# Altium PCB Driver Morpheus PONTE H.PcbDoc
Units mm, origin at the board's own origin, x right, y up, seen from the top; angles counter-clockwise.
Board outline 45.95 x 30.93 mm, 2 copper layers (Top Layer, Bottom Layer); 49 components, 26 nets, 137 pads, 17 vias.
Unrouted connection lines stored in the file: 31.
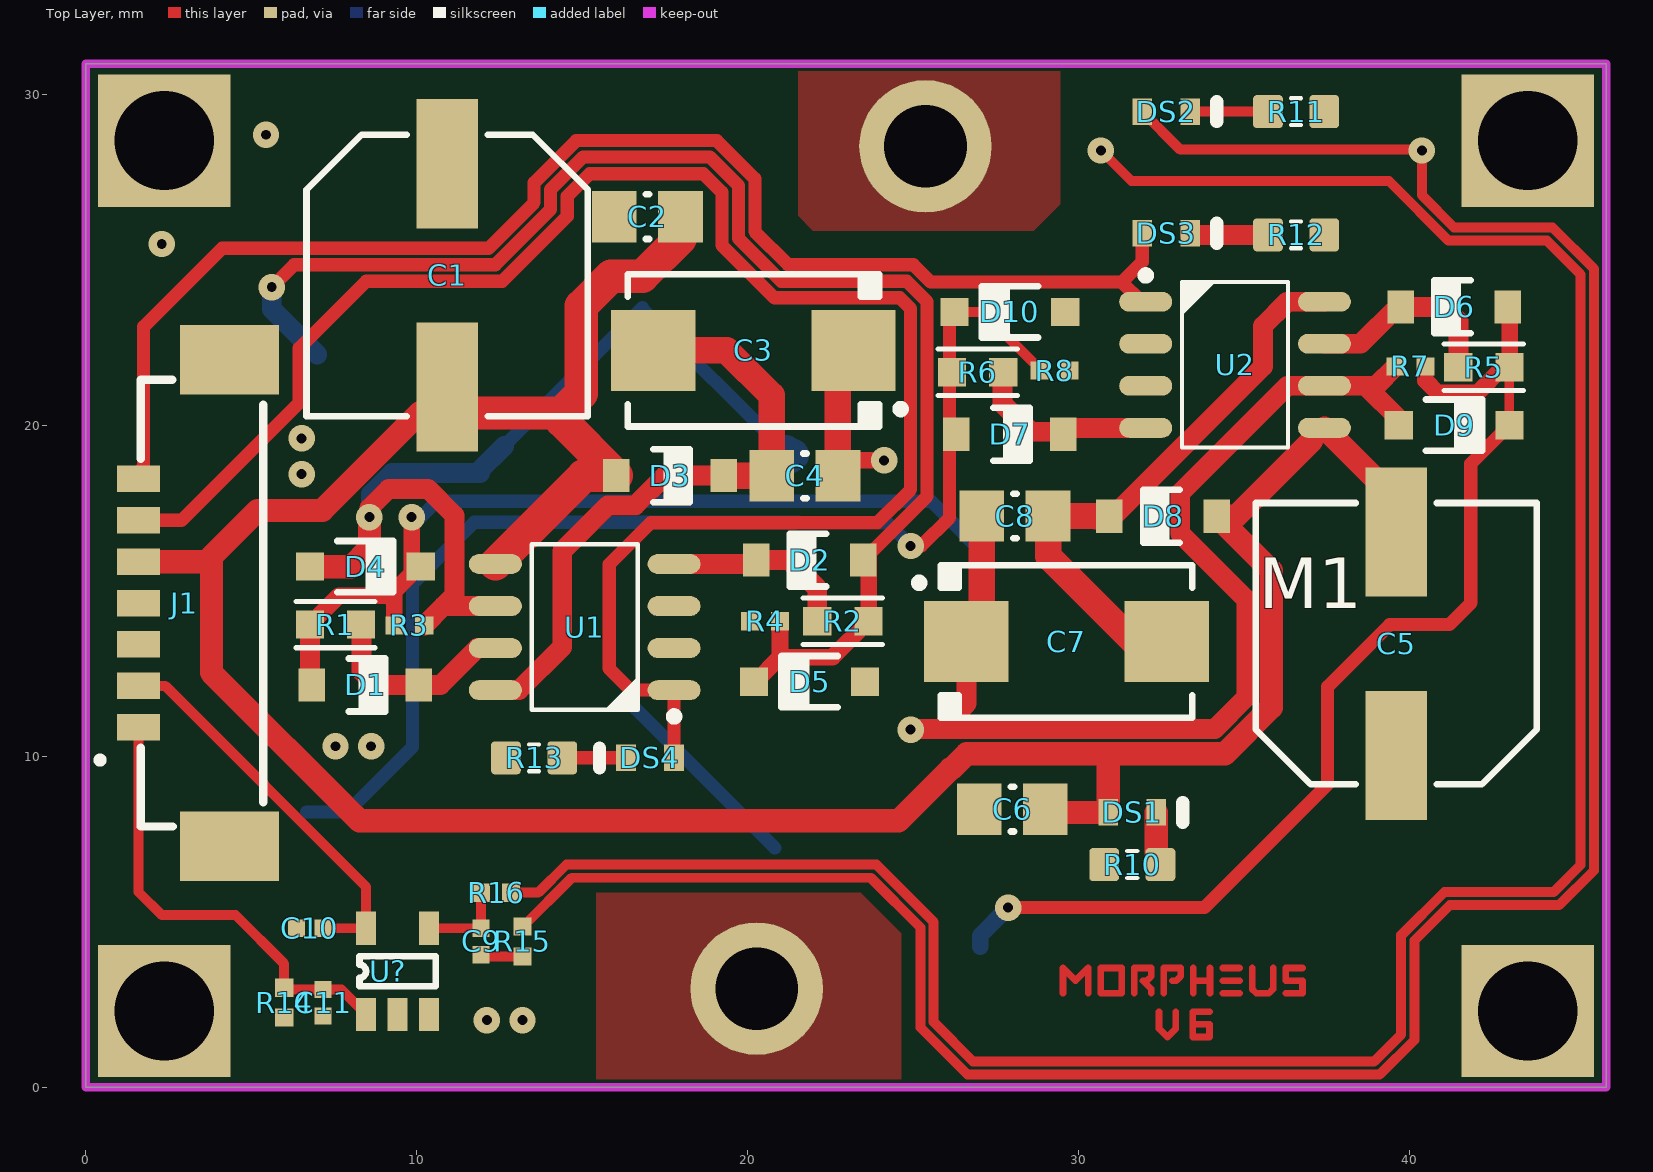
[diagram p0: Top Layer view]
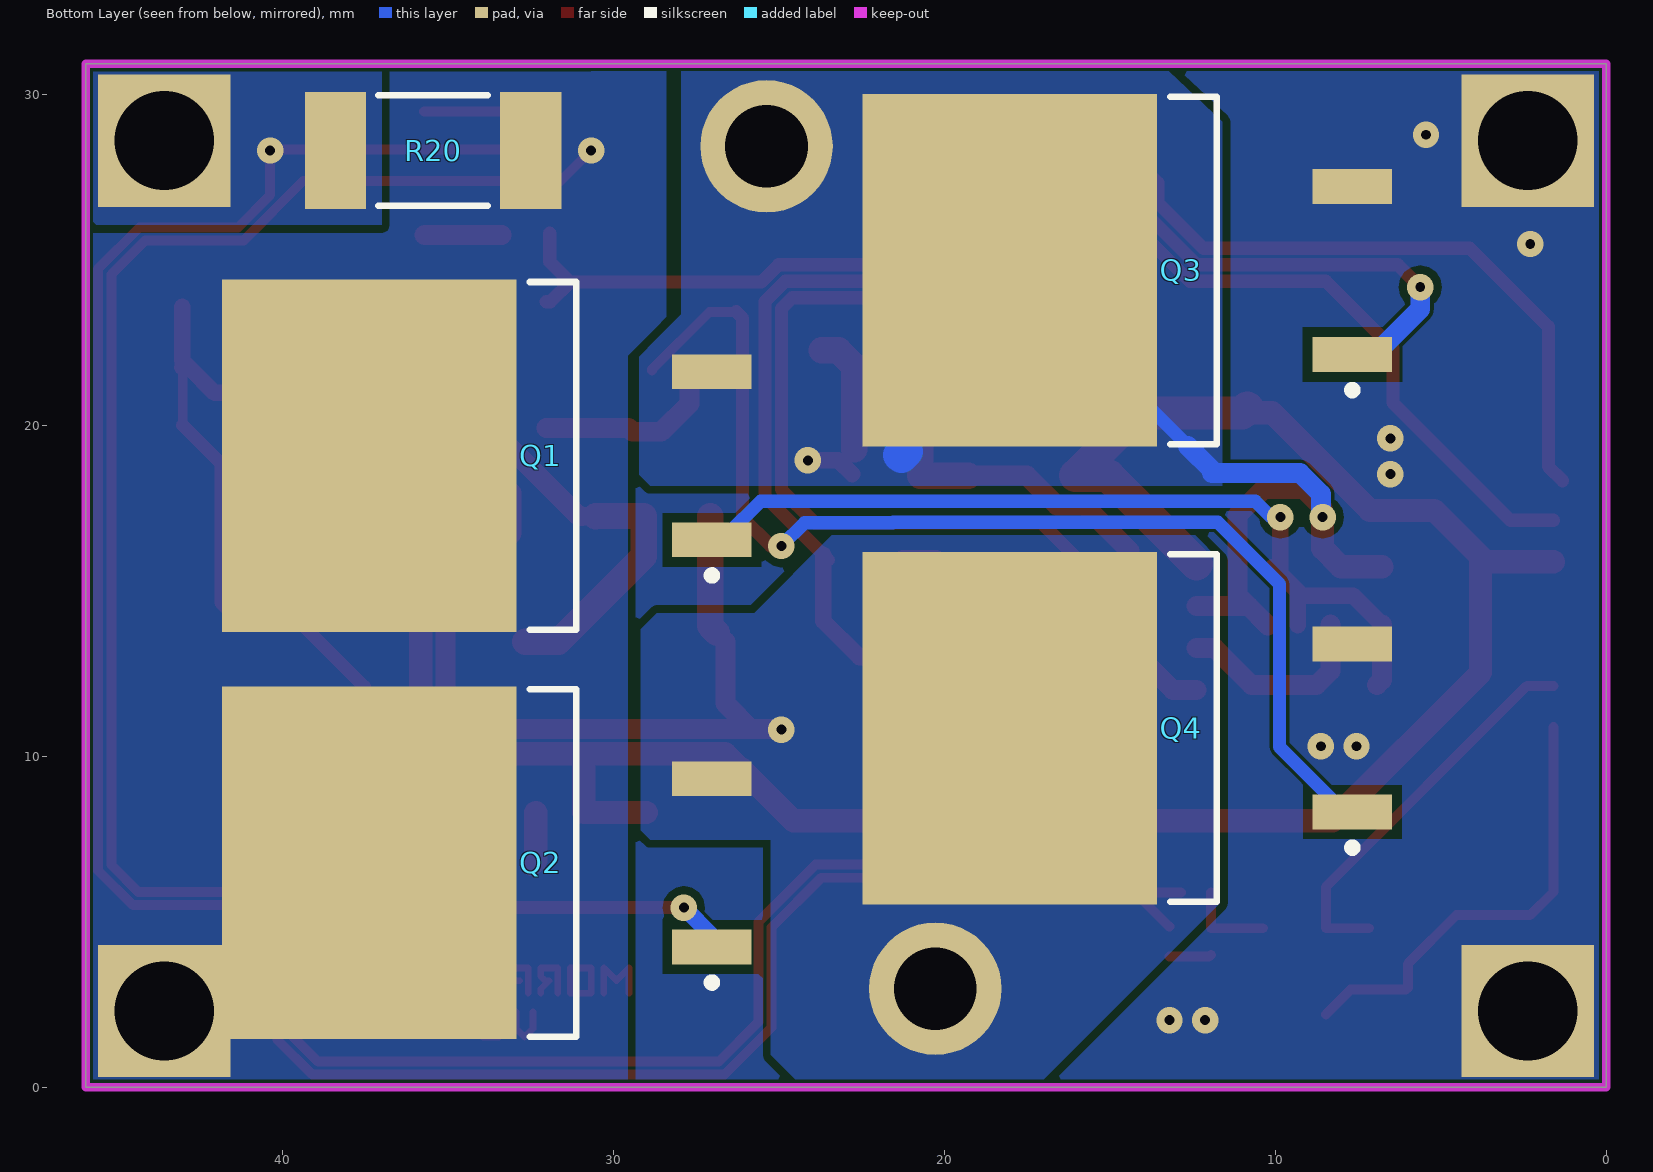
[diagram p1: Bottom Layer view, seen from below]

## Layer stack, top to bottom
Top Solder: solder mask 0.0102, Solder Resist, Dk 3.5
Top Layer: signal copper 0.0356
Dielectric 1: dielectric 0.32, FR-4, Dk 4.8
Bottom Layer: signal copper 0.0356
Bottom Solder: solder mask 0.0102, Solder Resist, Dk 3.5

## Board outline
0,0 45.95,0 45.95,30.925 0,30.925

## Design rules (kind name [scope] priority, off if disabled: settings)
BoardOutlineClearance [All] p1: gap=0 ignorepadtopadclearanceinfootprint=FALSE
Clearance Clearance_1 [IsPad vs InPolygon] p1: gap=0.3 ignorepadtopadclearanceinfootprint=TRUE
Clearance [All] p2: gap=0.24 ignorepadtopadclearanceinfootprint=TRUE except(0: SMDPad-Hole THPad-Hole Via-Hole Fill-Hole Poly-Hole Region-Hole Text-Hole; 0.1: Arc-Arc Arc-Track Arc-SMDPad Arc-THPad Arc-Via Arc-Fill Arc-Poly Arc-Region Arc-Text Arc-Hole Track-Track Track-SMDPad Track-THPad Track-Via Track-Fill Track-Poly Track-Region Track-Text Track-Hole)
ComponentClearance [All vs InComponentClass('IGNORA')] p1: gap=-1 collisioncheckmode=3 verticalgap=-1 showdistances=FALSE
ComponentClearance ComponentClearance_1 [All] p2: gap=0.254 collisioncheckmode=3 verticalgap=0.254 showdistances=FALSE
HoleSize [All] p1: absolutevalues=TRUE maxlimit=3.54 minlimit=0.025 maxpercent=80.000 minpercent=20.000
MinimumSolderMaskSliver [All] p1 off: minsoldermaskwidth=0.254
PlaneConnect [All] p1: planeconnectstyle=Direct reliefexpansion=0.508 reliefentries=4 reliefconductorwidth=0.254 reliefairgap=0.254
PolygonConnect [All] p1: connectstyle=Direct reliefconductorwidth=0.254 reliefentries=4 polygonreliefangle="90 Angle" airgapwidth=0.254
RoutingVias [All] p1: holewidth=0.3 width=0.4 viastyle="Through Hole" minholewidth=0.3 minwidth=0.4 maxholewidth=0.4 maxwidth=0.6
SMDNeckDown [InNet('No Net')] p1: percent=70.000
SilkToSilkClearance [All] p1 off: silktosilkclearance=0.254
SilkToSolderMaskClearance [IsPad] p1 off: minsilkscreentomaskgap=0.254 clearancetoexposedcopper=TRUE
SolderMaskExpansion [All] p1: expansion=0.102
Width [All] p1: maxlimit=15 minlimit=0.01 preferedwidth=0.3
24 further rules are at their usual default settings.

## Classes and differential pairs
component class INA169: C9 C10 C11 R14 R15 R16 U?
component class "Driver Morpheus PONTE H": C1 C2 C3 C4 C5 C6 C7 C8 D1 D2 D3 D4 D5 D6 D7 D8 D9 D10 DS1 DS2 DS3 DS4 J1 Q1 Q2 Q3 Q4 R1 R2 R3 R4 R5 R6 R7 R8 R10 R11 R12 R13 R20 U1 U2

## Components (designator, comment, footprint, x,y, rotation, side; value= is the part's Value field where it differs from the comment)
C1 "100uF 25v" CAPAE9083X70M 10.925,24.525 r270 top
C2 "CAP 100nF 25V 0805(2012)" CAPC0805(2012)145_M#1 16.975,26.3 r0 top value=100nF
C3 "Cap_10u_35v" "CAP POL 2917/7343" 20.176,22.262 r180 top
C4 "CAP 100nF 25V 0805(2012)" CAPC0805(2012)145_M#2 197.372,-55.572 r180 top value=100nF
C5 "100uF 25v" CAPAE9083X70M 39.6,13.4 r90 top
C6 "CAP 100nF 25V 0805(2012)" CAPC0805(2012)145_M#1 28,8.4 r0 top value=100nF
C7 "Cap_10u_35v" "CAP POL 2917/7343" 29.636,13.463 r0 top
C8 "CAP 100nF 25V 0805(2012)" CAPC0805(2012)145_M#2 -147.56,91.297 r0 top value=100nF
C9 "CAP 100nF 25V" CAPC0402(1005)60_L 11.95,4.4 r270 top value=100nF
C10 "CAP 100nF 25V" CAPC0402(1005)60_L 6.775,4.8 r0 top value=100nF
C11 "CAP 100nF 25V" CAPC0402(1005)60_L 7.175,2.55 r90 top value=100nF
D1 "1N4148W" JSCJ-SOD-123-2_V 8.45,12.15 r0 top
D2 "1N4148W" JSCJ-SOD-123-2_V 21.881,15.925 r180 top
D3 "1N4148W" JSCJ-SOD-123-2_V 17.656,18.475 r0 top
D4 "MMSZ5248B-E3-08" VISH-SOD-123-2_V 8.45,15.725 r0 top
D5 "MMSZ5248B-E3-08" VISH-SOD-123-2_V 21.875,12.25 r180 top
D6 "1N4148W" JSCJ-SOD-123-2_V 41.35,23.575 r180 top
D7 "1N4148W" JSCJ-SOD-123-2_V 27.925,19.725 r0 top
D8 "1N4148W" JSCJ-SOD-123-2_V 32.555,17.25 r180 top
D9 "MMSZ5248B-E3-08" VISH-SOD-123-2_V 41.35,20 r0 top
D10 "MMSZ5248B-E3-08" VISH-SOD-123-2_V 27.925,23.425 r180 top
DS1 "TLMB1100-GS08" VISH-TLMX1100-2_V 31.625,8.3 r0 top
DS2 "TLMS1100-GS08" VISH-TLMX1100-2_V 32.65,29.475 r0 top
DS3 "TLMG1100-GS08" VISH-TLMX1100-2_V 32.65,25.8 r0 top
DS4 "TLMG1100-GS08" VISH-TLMX1100-2_V 17.05,9.95 r180 top
J1 "53398-0771" 53398-0771 1.668,7.875 r90 top
Q1 "IRF3205S" D2PAK_N 33.825,19.075 r0 bottom
Q2 "IRF3205S" D2PAK_N 33.825,6.775 r0 bottom
Q3 "IRF3205S" D2PAK_N 14.475,24.675 r0 bottom
Q4 "IRF3205S" D2PAK_N 14.475,10.85 r0 bottom
R1 "22" SMD-0603-RES 7.55,13.975 r270 top
R2 "22" SMD-0603-RES 22.881,14.075 r90 top
R3 "RC0402JR-071KL" RES-0402 9.781,13.95 r180 top value=10K
R4 "RC0402JR-071KL" RES-0402 20.531,14.075 r0 top value=10K
R5 "22" SMD-0603-RES 42.25,21.75 r270 top
R6 "22" SMD-0603-RES 26.95,21.6 r90 top
R7 "RC0402JR-071KL" RES-0402 40.031,21.775 r0 top value=10K
R8 "RC0402JR-071KL" RES-0402 29.281,21.65 r180 top value=10K
R10 "Thick Film" RESC1608X55N 31.625,6.725 r180 top value=750R
R11 "Thick Film" RESC1608X55N 36.575,29.475 r0 top value=2k
R12 "Thick Film" RESC1608X55N 36.575,25.75 r0 top value=200R
R13 "Thick Film" RESC1608X55N 13.55,9.95 r180 top value=200R
R14 "RC0402JR-071KL" RES-0402 6,2.55 r90 top value=10K
R15 "RC0402JR-071KL" RES-0402 13.2,4.4 r90 top value=100R
R16 "RC0402JR-071KL" RES-0402 12.4,5.875 r0 top value=100R
R20 "71-WSLF25121L000FEA" RESC6432X89X76ML25T25 35.45,28.3 r0 bottom
U1 "IR2184" SOIC127P600X175-8AN 15.081,13.9 r180 top
U2 "IR2184" SOIC127P600X175-8AN 34.731,21.825 r0 top
U? "INA169" SOT23-5 9.425,2.2 r0 top

## Footprints (in the part's own frame and the unit in brackets; to place one, negate y for a bottom-side part, rotate by r counter-clockwise, add the part's x,y. Pads: shape width x height; smd on the part's side, far side on the other; paste and mask are expansions set on the pad)
53398-0771 [mm]
  rect 0.8x1.3 smd: 1(3,0.068) 2(4.25,0.068) 3(5.5,0.068) 4(6.75,0.068) 5(8,0.068) 6(9.25,0.068) 7(10.5,0.068)
  rect 2.1x3 smd: 8(-0.6,-2.682) 9(14.1,-2.682)
  silkscreen extent 0,-3.7 13.5,1.3, body extent -0.22,-3.68 13.68,0.52, height 4.46
"CAP POL 2917/7343" [mm] "Molded Capacitor, 2-Leads, Body 7.30x4.30mm, IPC Medium Density"
  rect 2.55x2.45 smd: 1(-3.025,0) 2(3.025,0)
  silkscreen extent -4.58,-2.3 3.8,2.3, body extent -3.65,-2.15 3.65,2.15, height 4.1
CAPAE9083X70M [mm] "Aluminum Electrolytic Capacitor, Body 8,30x8,30x7,00mm, IPC Low Density"
  rect 3.9x1.85 smd: 1(-3.375,0) 2(3.375,0)
  silkscreen extent -4.25,-4.25 4.25,4.25, body extent -4.25,-4.25 4.25,4.25, height 7
CAPC0402(1005)60_L [mm] "Chip Capacitor, Body 1.0x0.5mm, Height 0.6mm, IPC High Density"
  rect 0.52x0.52 smd: 1(-0.4,0) 2(0.4,0)
  body extent -0.55,-0.3 0.55,0.3, height 0.6
CAPC0805(2012)145_M#1 [mm] "Chip Capacitor, Body 2.0x1.2mm, Height 1.45mm, IPC Low Density"
  rect 1.35x1.55 smd: 1(-1,0) 2(1,0)
  silkscreen extent -0.05,-0.67 0.05,0.67, body extent -1.1,-0.72 1.1,0.72, height 1.45
CAPC0805(2012)145_M#2 [mm] "Chip Capacitor, Body 2.0x1.2mm, Height 1.45mm, IPC Low Density"
  rect 1.35x1.55 smd: 1(174.641,-74.041) 2(176.641,-74.041)
  silkscreen extent 175.59,-74.72 175.69,-73.37, body extent 174.54,-74.77 176.74,-73.32, height 1.45
D2PAK_N [mm] "D-PAK/TO-263-3; 3 Leads (1 Cropped); Body 14.7 (inc. leads) x 10.2 mm (LxW max)"
  rect 2.4x1.05 smd: 1(-6.8,2.54) 3(-6.8,-2.54)
  rect 8.9x10.65 smd: 2(3.55,0)
  silkscreen extent -6.92,-5.25 -1.3,5.25, body extent -2.7,-5.28 6.3,5.28, height 4.69
JSCJ-SOD-123-2_V [mm] "SMD, 2-Leads, Body 2.7x1.6mm, Height 1.25mm"
  rect 0.8x1 smd: 1(-1.62,0) 2(1.62,0)
  silkscreen extent -0.5,-0.8 0.6,0.8, body extent -1.35,-0.8 1.35,0.8, height 1.25
RES-0402 [mm]
  rect 0.55x0.55 smd: 1(-0.45,0) 2(0.45,0)
  body extent -0.53,-0.27 0.53,0.28, height 0.4
RESC1608X55N [mm] "Chip Resistor, Body 1.6x0.8mm, EIA 0603, IPC Medium Density"
  round 0.254 on Mech15: 0(0,0)
  rrect25% 0.9x1 smd: 1(-0.85,0) 2(0.85,0)
  Top Layer pour cut-out: -0.6,0.5 -0.4,0.7 0.4,0.7 0.6,0.5 0.6,-0.5 0.4,-0.7 -0.4,-0.7 -0.6,-0.5
  silkscreen extent -0.15,-0.41 0.15,0.41, body extent -0.87,-0.47 0.88,0.48, height 0.54
RESC6432X89X76ML25T25 [mm] "Chip Resistor, 2-Leads, Body 6.6x3.43mm, IPC Low Density"
  rect 1.85x3.55 smd: 1(-2.95,0) 2(2.95,0)
  silkscreen extent -1.65,-1.68 1.65,1.68, body extent -3.3,-1.72 3.3,1.71, height 0.89
SMD-0603-RES [mm]
  rect 0.85x0.85 smd: 1(0,0.775) 2(0,-0.775)
  silkscreen extent -0.7,-1.2 0.7,1.2, body extent -0.4,-0.85 0.4,0.85, height 0.56
SOIC127P600X175-8AN [mm] "SOIC, 8-Leads, Body 4.9x3.9mm, Pitch 1.27mm, IPC Medium Density"
  round 1 on Mech15: 0(0,0)
  oval 1.6x0.6 smd: 1(-2.7,1.905) 2(-2.7,0.635) 3(-2.7,-0.635) 4(-2.7,-1.905) 5(2.7,-1.905) 6(2.7,-0.635) 7(2.7,0.635) 8(2.7,1.905)
  silkscreen extent -2.83,-2.5 1.6,2.82, body extent -3,-2.45 3,2.45, height 1.75
SOT23-5 [mm] "SOT143-4 as used in SP0503BAHTG"
  round 0.2 on Top Overlay: 1(-1.5,0.75)
  rect 0.6x1 smd: 1(-0.95,0) 2(0,0) 3(0.95,0) 4(0.95,2.6) 5(-0.95,2.6)
  silkscreen extent -1.15,0.85 1.15,1.75, body extent -1.46,0.13 1.46,2.47, height 1
VISH-SOD-123-2_V [mm] "SMD, 2-Leads, Body 2.7x1.55mm, Height 1.35mm"
  rect 0.85x0.85 smd: 1(-1.675,0) 2(1.675,0)
  silkscreen extent -0.85,-0.77 0.85,0.78, body extent -1.35,-0.77 1.35,0.77, height 1.35
VISH-TLMX1100-2_V [mm] "SMD, 2-Leads, Body 1.6x0.8mm"
  rect 0.6x0.8 smd: 1(-0.725,0) 2(0.725,0)
  silkscreen extent 1.53,-0.3 1.53,0.3, body extent -0.8,-0.4 0.8,0.4, height 0.65

## Part data
C1: library part Cap_10u_35v
C2 C4 C6 C8: library part CMP-1036-04408-1, "CAP 100nF 25V ±5% 0805 (2012 Metric) Thickness 1.45mm SMD", Case-EIA=0805, Case-Metric=2012, Rated Voltage="25 V", Tolerance=±5%, Max Thickness="1.45 mm", Technology=SMT
C5: library part Cap_100u_25v, "Cap Tântalo"
C9 C10 C11: library part CMP-1034-02073-1, "CAP 100nF 25V ±20% 0402 (1005 Metric) Thickness 0.6mm SMD", Case-EIA=0402, Case-Metric=1005, Rated Voltage="25 V", Tolerance=±20%, Max Thickness="0.6 mm", Technology=SMT
D1 D2 D3 D6 D7 D8: library part CMP-0914-00001-1, "Fast Switching Diode, 75 V, 150 mA, 2-Pin 2.7 x 1.6 x 1.25 mm SMD, Tape and Reel", Manufacturer="Changjiang Electronics", ComponentLink1Description="Manufacturer URL", ComponentLink1URL=http://www.cj-elec.com/, ComponentLink2Description=Datasheet, ComponentLink2URL=http://www.cj-elec.com/txUpfile/20121613352740313.pdf, ComponentLink3Description="Package Specification", ComponentLink3URL=http://www.cj-elec.com/txUpfile/201412112231195145.pdf, DatasheetVersion="Rev. A", IO (mA)=150, IR (uA)=1, Mounting Technology="Surface Mount", PackageDescription="2-Pin SMD, Body 2.7 x 1.6 mm, Height 1.25 mm", PackageReference=SOD-123-2, PackageVersion="Rev. A", Packing="Tape and Reel", PartNumber=1N4148W, PD (mW)=350, Trr (ns)=4, TSTG (degC)="-55 to 150", VF (V)=1.25, VR (V)=75
D4 D5 D9 D10: library part CMP-0931-00036-1, "Small Signal Zener Diode, 18 V +/- 5%, -55 to 155 degC, 2-Pin SOD-123, RoHS, Tape and Reel", Manufacturer="Vishay Semiconductor", Operating Temperature="-55 to 150 degC", Power Dissipation (mW)=500, Test Current (IZT1) (mA)=7, Tolerance="+/- 5%", Zener Voltage (NOM.) (V)=18, ComponentLink1Description="Manufacturer URL", ComponentLink1URL=http://www.vishay.com/, ComponentLink2Description=Datasheet, ComponentLink2URL=http://www.vishay.com/docs/85774/mmsz5225.pdf, ComponentLink3Description="Package Specification", ComponentLink3URL=http://www.vishay.com/docs/85774/mmsz5225.pdf, DatasheetVersion="Rev. 1.9", Int. Construction=Single, Mounting Technology="Surface Mount", PackageDescription="2-Pin SMD, Body 2.7 x 1.55 mm, Height 1.35 mm", PackageReference=SOD-123-2, PackageVersion="Rev. 1.9", Packing="Tape and Reel", PartNumber=MMSZ5248B-E3-08, RoHS=TRUE, Zener Impedance (IZT1) (Max.) (Ohm)=21
DS1: library part CMP-1666-00028-1, "Blue LED, 15 mA, 3.9 V, -40 to 100 degC, 2-Pin SMD (0603), RoHS, Tape and Reel / (https://br.mouser.com/datasheet/2/427/tlmb1100-279843.pdf)", Capacitance="10 nF", Case\Package=Radial, Max Operating Temperature="125 degC", Min Operating Temperature="-55 degC", Package Quantity=500, Tolerance=10%, Type (Capacitors)=X7R, Voltage Rating="100 V", ComponentLink1Description="Manufacturer URL", ComponentLink1URL=http://www.vishay.com/, ComponentLink2Description=Datasheet, ComponentLink2URL=http://download.siliconexpert.com/pdfs/2016/8/7/12/43/26/667/vsh_/manual/379263299541529tlmb1100.pdf, DatasheetVersion="Rev. 2.7, 03/2016", Height="2.54 mm", Lead Pitch="2.54 mm", Length="5.33 mm", Mount="Through Hole", PackageDescription="2-Pin Surface Mount Device, Body 1.6 x 0.8 mm", PackageReference=0603, Packaging=Bulk, Pins=2, Radiation Hardening=No, REACH SVHC="No SVHC", RoHSCompliant=true, Width="3.81 mm"
DS2: library part CMP-1666-00028-1, "Red LED, 10 mA, 2.0 V, -40 to 100 degC, 2-Pin SMD (0603), RoHS, Tape and Reel / (https://br.mouser.com/datasheet/2/427/tlmb1100-279843.pdf)", Capacitance="10 nF", Case\Package=Radial, Max Operating Temperature="125 degC", Min Operating Temperature="-55 degC", Package Quantity=500, Tolerance=10%, Type (Capacitors)=X7R, Voltage Rating="100 V", ComponentLink1Description="Manufacturer URL", ComponentLink1URL=http://www.vishay.com/, ComponentLink2Description=Datasheet, ComponentLink2URL=http://download.siliconexpert.com/pdfs/2016/8/7/12/43/26/667/vsh_/manual/379263299541529tlmb1100.pdf, DatasheetVersion="Rev. 2.7, 03/2016", Height="2.54 mm", Lead Pitch="2.54 mm", Length="5.33 mm", Mount="Through Hole", PackageDescription="2-Pin Surface Mount Device, Body 1.6 x 0.8 mm", PackageReference=0603, Packaging=Bulk, Pins=2, Radiation Hardening=No, REACH SVHC="No SVHC", RoHSCompliant=true, Width="3.81 mm"
DS3 DS4: library part CMP-1666-00028-1, "Green LED, 15 mA, 2.1 V, -40 to 100 degC, 2-Pin SMD (0603), RoHS, Tape and Reel / (https://br.mouser.com/datasheet/2/427/tlmb1100-279843.pdf)", Capacitance="10 nF", Case\Package=Radial, Max Operating Temperature="125 degC", Min Operating Temperature="-55 degC", Package Quantity=500, Tolerance=10%, Type (Capacitors)=X7R, Voltage Rating="100 V", ComponentLink1Description="Manufacturer URL", ComponentLink1URL=http://www.vishay.com/, ComponentLink2Description=Datasheet, ComponentLink2URL=http://download.siliconexpert.com/pdfs/2016/8/7/12/43/26/667/vsh_/manual/379263299541529tlmb1100.pdf, DatasheetVersion="Rev. 2.7, 03/2016", Height="2.54 mm", Lead Pitch="2.54 mm", Length="5.33 mm", Mount="Through Hole", PackageDescription="2-Pin Surface Mount Device, Body 1.6 x 0.8 mm", PackageReference=0603, Packaging=Bulk, Pins=2, Radiation Hardening=No, REACH SVHC="No SVHC", RoHSCompliant=true, Width="3.81 mm"
J1: "7 way SMT straight header Molex PICOBLADE Series, Series Number 53398, 1.25mm Pitch 7 Way 1 Row Straight PCB Header, Solder Termination, 1A", Manufacturer_Name=Molex, RS Part Number=5427220P, Allied_Number=70373150, Allied Price/Stock=http://www.alliedelec.com/molex-incorporated-53398-0771/70373150/, Arrow Part Number=53398-0771, Arrow Price/Stock=http://uk.rs-online.com/web/p/products/5427220P, Datasheet Link=http://www.molex.com/webdocs/datasheets/pdf/en-us/0533980771_PCB_HEADERS.pdf, Manufacturer_Part_Number=53398-0771, RS Price/Stock=http://uk.rs-online.com/web/p/products/5427220P
Q1 Q2 Q3 Q4: "HEXFET Power MOSFET", ComponentLink1Description="Manufacturer Link", ComponentLink1URL=http://www.irf.com/, ComponentLink2Description=Datasheet, ComponentLink2URL=http://www.irf.com/product-info/datasheets/data/irf3205s.pdf, DatasheetVersion=Aug-1997, LatestRevisionDate=20-Nov-2009, LatestRevisionNote="IPC-7351 Footprint Added.", PackageDescription="3-Pin Transistor Outline Package 2.54 mm Pitch, 15.1 mm Lead Span", PackageReference=D2PAK, Published=8-Jun-2000, Publisher="Altium Limited"
R1 R2 R5 R6: library part ERJ-3EKF22R0V, "RES SMD 22 OHM 1% 1/10W 0603", Digi-Key Part Number=P22.0HCT-ND, Manufacturer="Panasonic Electronic Components", Operating Temperature="-55°C ~ 155°C", Package / Case="0603 (1608 Metric)", Power (Watts)="0.1W, 1/10W", Supplier Device Package=0603, Temperature Coefficient=±100ppm/°C, Tolerance=±1%, @ qty=1500, Composition="Thick Film", Datasheets=http://industrial.panasonic.com/www-cgi/jvcr13pz.cgi?E+PZ+3+AOA0002+ERJ3EKF22R0V+7+WW, Factory Stock=0, Failure Rate=-, Features="Automotive AEC-Q200", Height - Seated (Max)="0.022\" (0.55mm)", Image=//media.digikey.com/Photos/Panasonic%20Photos/MFG_ERJ-P6W%20Series.jpg, Minimum Quantity=1, Number of Terminations=2, Packaging="Cut Tape (CT)", Part Number=ERJ-3EKF22R0V, Part Status=Active, Quantity Available=100321, Series=ERJ, Size / Dimension="0.063\" L x 0.031\" W (1.60mm x 0.80mm)", Unit Price (USD)=0.00379
R3 R4 R7 R8 R14: library part "RES 1K 0402", "RES SMD 10K OHM 5% 1/16W 0402"
R10: library part RES_220R_0603_5%, "Resistor SMD chip 750 Ohm 1/16W 5% 0603", Manufacturer 1=Yageo, Manufacturer 2="Panasonic Electronic Components", Manufacturer 3="Stackpole Electronics Inc", Manufacturer 4="Rohm Semiconductor", Manufacturer 5="Royal Ohm", Manufacturer Part Number 1=RC0603JR-07220RL, Manufacturer Part Number 2=ERJ-3GEYJ221V, Manufacturer Part Number 3=RMCF0603JT220R, Manufacturer Part Number 4=MCR03ERTJ221, Manufacturer Part Number 5=0603WAJ0221, Package / Case="0603 (1608 metric)", Ratings="1/10 W", Supplier Part Number 1=311-220GRCT-ND, Tolerance=±5%, ComponentLink1Description=http://www.yageo.com/documents/recent/PYu-RC0603_51_RoHS_L_4.pdf, ComponentLink1URL=http://www.yageo.com/documents/recent/PYu-RC0603_51_RoHS_L_4.pdf, ComponentLink2Description=http://industrial.panasonic.com/www-cgi/jvcr13pz.cgi?E+PZ+3+AOA0001+ERJ3GEYJ221V+7+WW, ComponentLink2URL=http://industrial.panasonic.com/www-cgi/jvcr13pz.cgi?E+PZ+3+AOA0001+ERJ3GEYJ221V+7+WW, ComponentLink3Description=http://www.seielect.com/Catalog/SEI-RMCF_RMCP.pdf, ComponentLink3URL=http://www.seielect.com/Catalog/SEI-RMCF_RMCP.pdf, ComponentLink4Description=http://rohmfs.rohm.com/en/products/databook/datasheet/passive/resistor/chip_resistor/mcr_g.pdf, ComponentLink4URL=http://rohmfs.rohm.com/en/products/databook/datasheet/passive/resistor/chip_resistor/mcr_g.pdf, Material="Thick Film", RoHS 1="RoHS Compliant", RoHS 2="RoHS Compliant", RoHS 3="RoHS Compliant", RoHS 4="RoHS Compliant", SCDType=spec, Supplier 1=Digi-Key, Supplier 2=Digi-Key, Supplier 3=Digi-Key, Supplier 4=Digi-Key, Supplier Part Number 2=P220GCT-ND, Supplier Part Number 3=RMCF0603JT220RCT-ND, Supplier Part Number 4=RHM220CGCT-ND
R11: library part RES_220R_0603_5%, "Resistor SMD chip 2k Ohm 1/16W 5% 0603", Manufacturer 1=Yageo, Manufacturer 2="Panasonic Electronic Components", Manufacturer 3="Stackpole Electronics Inc", Manufacturer 4="Rohm Semiconductor", Manufacturer 5="Royal Ohm", Manufacturer Part Number 1=RC0603JR-07220RL, Manufacturer Part Number 2=ERJ-3GEYJ221V, Manufacturer Part Number 3=RMCF0603JT220R, Manufacturer Part Number 4=MCR03ERTJ221, Manufacturer Part Number 5=0603WAJ0221, Package / Case="0603 (1608 metric)", Ratings="1/10 W", Supplier Part Number 1=311-220GRCT-ND, Tolerance=±5%, ComponentLink1Description=http://www.yageo.com/documents/recent/PYu-RC0603_51_RoHS_L_4.pdf, ComponentLink1URL=http://www.yageo.com/documents/recent/PYu-RC0603_51_RoHS_L_4.pdf, ComponentLink2Description=http://industrial.panasonic.com/www-cgi/jvcr13pz.cgi?E+PZ+3+AOA0001+ERJ3GEYJ221V+7+WW, ComponentLink2URL=http://industrial.panasonic.com/www-cgi/jvcr13pz.cgi?E+PZ+3+AOA0001+ERJ3GEYJ221V+7+WW, ComponentLink3Description=http://www.seielect.com/Catalog/SEI-RMCF_RMCP.pdf, ComponentLink3URL=http://www.seielect.com/Catalog/SEI-RMCF_RMCP.pdf, ComponentLink4Description=http://rohmfs.rohm.com/en/products/databook/datasheet/passive/resistor/chip_resistor/mcr_g.pdf, ComponentLink4URL=http://rohmfs.rohm.com/en/products/databook/datasheet/passive/resistor/chip_resistor/mcr_g.pdf, Material="Thick Film", RoHS 1="RoHS Compliant", RoHS 2="RoHS Compliant", RoHS 3="RoHS Compliant", RoHS 4="RoHS Compliant", SCDType=spec, Supplier 1=Digi-Key, Supplier 2=Digi-Key, Supplier 3=Digi-Key, Supplier 4=Digi-Key, Supplier Part Number 2=P220GCT-ND, Supplier Part Number 3=RMCF0603JT220RCT-ND, Supplier Part Number 4=RHM220CGCT-ND
R12 R13: library part RES_220R_0603_5%, "Resistor SMD chip 200 Ohm 1/16W 5% 0603", Manufacturer 1=Yageo, Manufacturer 2="Panasonic Electronic Components", Manufacturer 3="Stackpole Electronics Inc", Manufacturer 4="Rohm Semiconductor", Manufacturer 5="Royal Ohm", Manufacturer Part Number 1=RC0603JR-07220RL, Manufacturer Part Number 2=ERJ-3GEYJ221V, Manufacturer Part Number 3=RMCF0603JT220R, Manufacturer Part Number 4=MCR03ERTJ221, Manufacturer Part Number 5=0603WAJ0221, Package / Case="0603 (1608 metric)", Ratings="1/10 W", Supplier Part Number 1=311-220GRCT-ND, Tolerance=±5%, ComponentLink1Description=http://www.yageo.com/documents/recent/PYu-RC0603_51_RoHS_L_4.pdf, ComponentLink1URL=http://www.yageo.com/documents/recent/PYu-RC0603_51_RoHS_L_4.pdf, ComponentLink2Description=http://industrial.panasonic.com/www-cgi/jvcr13pz.cgi?E+PZ+3+AOA0001+ERJ3GEYJ221V+7+WW, ComponentLink2URL=http://industrial.panasonic.com/www-cgi/jvcr13pz.cgi?E+PZ+3+AOA0001+ERJ3GEYJ221V+7+WW, ComponentLink3Description=http://www.seielect.com/Catalog/SEI-RMCF_RMCP.pdf, ComponentLink3URL=http://www.seielect.com/Catalog/SEI-RMCF_RMCP.pdf, ComponentLink4Description=http://rohmfs.rohm.com/en/products/databook/datasheet/passive/resistor/chip_resistor/mcr_g.pdf, ComponentLink4URL=http://rohmfs.rohm.com/en/products/databook/datasheet/passive/resistor/chip_resistor/mcr_g.pdf, Material="Thick Film", RoHS 1="RoHS Compliant", RoHS 2="RoHS Compliant", RoHS 3="RoHS Compliant", RoHS 4="RoHS Compliant", SCDType=spec, Supplier 1=Digi-Key, Supplier 2=Digi-Key, Supplier 3=Digi-Key, Supplier 4=Digi-Key, Supplier Part Number 2=P220GCT-ND, Supplier Part Number 3=RMCF0603JT220RCT-ND, Supplier Part Number 4=RHM220CGCT-ND
R15 R16: library part "RES 1K 0402", "RES SMD 100 OHM 5% 1/16W 0402"
R20: library part CMP-2000-07419-1, "Chip Resistor, 1 mOhm, +/- 1%, 6 W, -65 to 170 degC, 2512 (6432 Metric), RoHS, Tape and Reel                        71-WSLF25121L000FEA", Case Code - in=2512, Case Code - mm=6432, Case Height=0.635mm, Case Length=6.4mm, Case Width=3.2mm, Manufacturer=Vishay, Operating Temperature Range=-65Cto+170C, Package / Case=2512(6432metric), Package Description="2-Pin Surface Mount Device, Body 6.35 x 3.18 mm", Power Rating=6W, Resistance=0.009Ohms, Temperature Coefficient=75PPM/C, Tolerance=1%, Brand=Vishay/Dale, Datasheet URL=http://www.vishay.com/docs/30100/wsl.pdf, Datasheet Version=07/2016, Factory Pack Quantity=2000, Manufacturer URL=http://www.vishay.com/, Mounting Technology=SurfaceMount, Package Reference=2512, Packaging=Reel, Product=MetalElementCurrentSensingResistors, Product Category=CurrentSenseResistors-SMD, RoHS=Details, Series=WSL, Termination Style=SMD/SMT, Type=PowerMetalStripResistors,LowValue(downto0.0005Ohms),SurfaceMount
U1 U2: PSpiceTemplate="X^@REFDES %VCC %IN %SD %COM %VB %HO %VS %LO @MODEL PARAMS:  ?CDELAY|CDELAY=@CDELAY||CDELAY=50N| ?RDELAY|RDELAY=@RDELAY||RDELAY=50| ?T1|T1=@T1||T1=-40| ?T2|T2=@T2||T2=25| ?T3|T3=@T3||T3=125| ?V1|V1=@V1||V1=10| ?V2|V2=@V2||V2=15| ?V3|V3=@V3||V3=20| ?TOFFT1|TOFFT1=@TOFFT1||TOFFT1=270N| ?TOFFT2|TOFFT2=@TOFFT2||TOFFT2=270N| ?TOFFT3|TOFFT3=@TOFFT3||TOFFT3=270N| ?TOFFV1|TOFFV1=@TOFFV1||TOFFV1=270N| ?TOFFV2|TOFFV2=@TOFFV2||TOFFV2=270N| ?TOFFV3|TOFFV3=@TOFFV3||TOFFV3=270N| ?TONT1|TONT1=@TONT1||TONT1=210N| ?TONT2|TONT2=@TONT2||TONT2=210N| ?TONT3|TONT3=@TONT3||TONT3=210N| ?TONV1|TONV1=@TONV1||TONV1=210N| ?TONV2|TONV2=@TONV2||TONV2=210N| ?TONV3|TONV3=@TONV3||TONV3=210N|", CDELAY=50N, RDELAY=50, T1=-40, T2=25, T3=125, TOFFT1=270N, TOFFT2=270N, TOFFT3=270N, TOFFV1=270N, TOFFV2=270N, TOFFV3=270N, TONT1=210N, TONT2=210N, TONT3=210N, TONV1=210N, TONV2=210N, TONV3=210N, V1=10, V2=15, V3=20
U?: Package=SOT23-5, Availability=Unavailable, DeviceSetName=INA169, GateName_1=G$1, LibraryName=INA169, MF="Texas Instruments", MP=INA169, Price=None, SymbolName_1=INA169

## Free pads (board coordinates)
  rect 4x4 hole 3: 8(2.375,2.3) 8(2.375,28.6) 8(43.575,2.3) 8(43.575,28.6)
  round 4 hole 2.5: 8(20.275,2.975) 8(25.375,28.425)

## Via types
v1: diameter 0.8, hole 0.3, Top Layer to Bottom Layer, 17 vias

## Nets (pads, with @x,y where several pads share a name; then routed paths per layer and width w, separated by ;. In a path a pad name is that pad's centre, name@x,y a point inside that pad or via, vN(x,y) a via of type N, cw(c..) or ccw(c..) an arc to the next point about the centre after c; other vN are vias at no path point)
+3.3v: C10.2 J1.2 U?.5 | length 11.9
  Top Layer w0.3: J1.2 2.404,12.125 8.475,6.054 U?.5 C10.2
"BAT 5S": DS2.1 pad.8@43.575,28.6 R15.2 R20.2 | length 77.5
  Top Layer w0.3: R15.2 13.216,4.85 14.691,6.325 23.725,6.325 25.225,4.825 25.225,1.8 26.648,0.377 39.1,0.377 40.15,1.427 40.15,4.425 41.225,5.5 44.525,5.5 45.573,6.548 45.573,24.725 44.323,25.975 41.35,25.975 40.375,26.95 v1(40.375,28.3) 40.35,28.325 33.075,28.325 DS2.1 ; pad.8@42.625,29.55 pad.8@43.575,28.6
GND: C1.1 C2.1 C5.1 C6.1 C10.1 C11.1 D5.1 D10.1 J1.4 pad.8@2.375,2.3 pad.8@2.375,28.6 Q3.3 Q4.3 R4.1 R8.1 R10.2 R11.2 R12.2 R13.2 R14.1 U1.3 U2.3 U?.2
  other v1: 12.125,2.025 13.2,2.025 7.55,10.3 8.625,10.3 6.525,18.525 6.525,19.6 2.3,25.475 5.45,28.775
IN_1: DS4.1 J1.6 U1.1 | length 54.5
  Top Layer w0.4: J1.6 2.9,17.125 6.45,20.675 6.45,22.325 8.475,24.35 12.589,24.35 14.55,26.311 14.55,26.918 15.232,27.6 18.661,27.6 19.225,27.036 19.225,25.436 20.811,23.85 24.6,23.85 24.925,23.525 24.925,18.056 23.919,17.05 17.075,17.05 15.825,15.8 15.825,12.645 16.475,11.995 U1.1 17.775,11.989 DS4.1
IN_2: DS3.1 J1.7 U2.1 | length 42.5
  Top Layer w0.4: J1.7@1.325,18.325 1.75,18.75 1.75,22.975 4.125,25.35 12.175,25.35 13.55,26.725 13.55,27.332 14.818,28.6 19.075,28.6 20.225,27.45 20.225,25.85 21.225,24.85 25.014,24.85 25.539,24.325 31.311,24.325 ; DS3.1 31.925,24.939 31.311,24.325 ; U2.1 31.906,23.73 31.311,24.325
NetC3_1: C3.1 C4.1 D4.1 pad.8@25.375,28.425 Q1.3 Q3.2 R3.1 U1.6 | length 34.8
  Top Layer w0.3: C4.1 C4.1@22.787,18.525
  Top Layer w0.4: 22.731,19.275 C4.1@22.806,19.2
  Top Layer w0.5: C4.1@22.787,18.525 23.199,18.937 v1(24.125,18.937)
  Top Layer w0.6: v1(8.575,17.225) 8.575,17.5 9.15,18.075 10.35,18.075 11.15,17.275 11.15,14.869 10.816,14.535 ; R3.1 10.816,14.535 ; U1.6 10.816,14.535
  Top Layer w0.7: D4.1 8.025,15.725 8.575,16.275 v1(8.575,17.225)
  Top Layer w0.8: 22.731,19.275 22.731,21.792 C3.1 C3.1@23.708,22.262
  Bottom Layer w0.4: 12.65,19.375 Q3.2@16.825,23.55 ; Q3.2@16.825,23.525 21.15,19.2
  Bottom Layer w0.6: v1@8.622,17.178 8.622,17.922 9.256,18.556 11.919,18.556 ; 11.875,18.6 12.65,19.375
  Bottom Layer w1: 21.15,19.2 21.3,19.05 21.35,19.1
NetC3_2: C3.2 C4.2 D3.2 U1.8 | length 19.3
  Top Layer w0.6: U1.8 13.095,11.995 14.4,13.3 14.4,16.2 15.775,17.575 16.602,17.575 17.502,18.475 D3.2
  Top Layer w0.8: C3.2 19.369,22.262 20.731,20.9 C4.2 ; D3.2 C4.2@20.725,18.475
NetC7_1: C7.1 C8.1 D9.1 pad.8@20.275,2.975 Q2.3 Q4.2 R7.1 U2.6 | length 40.3
  Top Layer w0.4: C7.1 26.873,13.725 C7.1@26.975,13.725
  Top Layer w0.6: v1(24.925,10.8) 24.95,10.825 25.85,10.825 ; C7.1 26.611,11.586 25.85,10.825 ; C8.1@27.076,17.261 C8.1 ; R7.1 38.996,21.19 38.675,21.19 ; D9.1@39.746,20 39.71,20.035 39.71,20.155 38.675,21.19 ; 25.85,10.825 34.116,10.825 35.075,11.784 35.075,14.725 33.075,16.725 33.075,17.95 36.315,21.19 U2.6 38.675,21.19
  Top Layer w0.8: C7.1@26.873,13.725 27.081,13.933 C8.1
  Bottom Layer w0.4: Q4.2@16.625,11.425 Q4.2@20.825,7.225
NetC7_2: C7.2 C8.2 D8.2 U2.8 | length 17.2
  Top Layer w0.6: D8.2 31.049,17.25 35.575,21.776 35.575,23 36.305,23.73 U2.8
  Top Layer w0.8: D8.2@30.536,17.25 C8.2 29.081,16.044 31.662,13.463 C7.2
NetC9_1: C9.1 R16.1 U?.4 | length 2.7
  Top Layer w0.3: U?.4 C9.1 R16.1
NetC9_2: C9.2 R15.1 U?.3 | length 1.3
  Top Layer w0.3: C9.2 12,3.95 R15.1
NetC11_2: C11.2 J1.1 R14.2 U?.1@8.475,2.2 | length 13.8
  Top Layer w0.3: J1.1 1.6,5.9 2.3,5.2 4.525,5.2 6,3.725 R14.2 6.05,2.95 C11.2 7.725,2.95 U?.1@8.475,2.2
NetD1_1: D1.1 D4.2 Q1.1 R1.2 R3.2 | length 26.4
  Top Layer w0.5: R1.2@6.781,13.975 7.656,14.85 9.156,14.85 9.331,14.675 ; R3.2 9.331,14.675 ; v1(9.85,17.225) D4.2@9.85,15.509 ; D4.2@10.066,15.725 D4.2@9.85,15.509 ; 9.331,14.675 9.331,14.99 D4.2@9.85,15.509
  Top Layer w0.6: R1.2@6.781,13.975 6.781,12.305 D1.1@6.936,12.15
  Bottom Layer w0.4: v1(9.85,17.225) 10.125,17.225 10.605,17.705 25.55,17.705 26.542,16.713 26.542,16.692 Q1.1@26.862,16.372
NetD1_2: D1.2 R1.1 U1.7 | length 6.1
  Top Layer w0.6: R1.1@8.331,13.975 8.331,12.575 8.756,12.15 10.725,12.15 11.84,13.265 U1.7
NetD2_1: D2.1 D5.2 Q3.1 R2.2 R4.2 | length 43
  Top Layer w0.4: v1(5.624,24.175) 6.299,24.85 12.382,24.85 14.05,26.518 14.05,27.125 15.025,28.1 18.868,28.1 19.725,27.243 19.725,25.643 21.018,24.35 24.807,24.35 25.425,23.732 25.425,17.849 23.656,16.08 D2.1
  Top Layer w0.5: D5.2@20.24,12.25 20.981,12.991 ; R4.2 20.981,12.991 ; D2.1@23.656,16.08 R2.2 22.572,12.991 20.981,12.991
  Bottom Layer w0.6: v1(5.624,24.175) 5.624,23.511 Q3.1@7,22.135
NetD2_2: D2.2 R2.1 U1.4 | length 5.7
  Top Layer w0.6: U1.4 20.141,15.805 D2.2 21.256,15.925 22.106,15.075 R2.1
NetD6_1: D6.1 D9.2 Q2.1 R5.1 R7.2 | length 34
  Top Layer w0.3: D9.2@43.016,20 43.016,21.735 R5.1@43.031,21.75
  Top Layer w0.4: v1(27.875,5.425) 33.8,5.425 37.525,9.15 37.525,12.1 39.4,13.975 41.2,13.975 41.85,14.625 41.85,18.834 D9.2@43.016,20
  Top Layer w0.5: R7.2 40.481,21.35 40.856,20.975 42.051,20.975 R5.1@42.826,21.75 ; D6.1@43.025,23.575 43.025,21.949 R5.1@42.826,21.75 ; R5.1@43.031,21.75 R5.1@42.826,21.75
  Bottom Layer w0.5: Q2.1 27.025,4.575 v1(27.875,5.425)
NetD6_2: D6.2 R5.2 U2.7 | length 5.9
  Top Layer w0.6: U2.7 38.521,22.46 39.636,23.575 41.056,23.575 41.481,23.15 R5.2@41.481,21.975
NetD7_1: D7.1 D10.2 Q4.1 R6.1 R8.2 | length 36.2
  Top Layer w0.3: D10.2@26.29,23.425 27.104,23.425 28.831,21.698 R8.2
  Top Layer w0.4: v1(24.925,16.35) 25.25,16.35 26.106,17.206 26.106,23.241 D10.2@26.29,23.425
  Bottom Layer w0.4: Q4.1@6.675,8.31 Q4.1 7.91,8.31 9.875,10.275 9.875,15.2 11.74,17.065 21.547,17.065 21.562,17.05 24.225,17.05 v1(24.925,16.35)
NetD7_2: D7.2 R6.2 U2.4 | length 5.7
  Top Layer w0.6: R6.2@27.706,21.6 27.706,20.65 28.556,19.8 29.425,19.8 29.545,19.92 U2.4
NetDS1_2: DS1.2 R10.1 | length 1.6
  Top Layer w0.7: DS1.2 32.35,6.85 R10.1
NetDS2_2: DS2.2 R11.1 | length 2.4
  Top Layer w0.3: DS2.2 R11.1
NetDS3_2: DS3.2 R12.1 | length 2.3
  Top Layer w0.6: DS3.2@33.375,25.75 R12.1@35.706,25.75
NetDS4_2: DS4.2 R13.1 | length 1.9
  Top Layer w0.4: R13.1 DS4.2
NetQ1_2: pad.8@43.575,2.3 Q1.2 Q2.2 R16.2 R20.1 | length 75
  Top Layer w0.3: R16.2 13.675,5.875 14.525,6.725 23.891,6.725 25.625,4.991 25.625,1.966 26.814,0.777 38.934,0.777 39.75,1.593 39.75,4.591 41.059,5.9 44.359,5.9 45.173,6.714 45.173,24.559 44.157,25.575 41.184,25.575 39.384,27.375 31.6,27.375 v1(30.675,28.3)
Vcc: C1.2 C2.2 C5.2 C6.2 D3.1 D8.1 DS1.1 J1.5 U1.5 U2.5 | length 86.7
  Top Layer w0.4: C2.2@17.975,25.65 C2.2
  Top Layer w0.7: J1.5 3.8,15.875 3.8,12.525 8.275,8.05 24.564,8.05 26.139,9.625 26.171,9.625 26.621,10.075 30.85,10.075 ; 3.8,16.025 5.2,17.425 7.15,17.425 10.1,20.375 10.7,20.375 C1.2@10.85,20.525 ; C6.2@29,8.3 DS1.1 30.9,10.025 30.85,10.075 ; 37.031,19.519 34.761,17.25 D8.1 35.825,15.6 35.825,11.473 34.427,10.075 30.85,10.075 ; U2.5 39.425,17.926 39.425,17.125 39.6,16.95 C5.2
  Top Layer w1: C1.2@10.85,20.525 11.006,20.369 14.381,20.369 ; U1.5 15.051,18.475 D3.1 14.381,20.13 14.381,20.369 ; C2.2@17.975,25.65 16.825,24.5 15.875,24.5 14.975,23.6 14.975,20.963 14.381,20.369
pads on no net: J1.3 J1.8 J1.9 R10.0 R11.0 R12.0 R13.0 U1.0 U1.2 U2.0 U2.2 U?.1@7.925,2.95
copper on no net: | length 21.7
  Top Layer w0.2: 29.53,2.838 29.53,2.965 29.53,3.6 29.911,3.219 30.292,3.6 30.292,2.838 ; 30.673,2.838 30.673,3.6 31.308,3.6 31.308,2.838 30.686,2.838 ; 31.689,2.838 31.689,3.6 32.197,3.6 32.197,3.346 32.07,3.219 31.943,3.219 32.197,2.965 32.197,2.838 ; 32.434,2.275 32.434,1.767 32.688,1.513 32.942,1.767 32.942,2.275 ; 32.578,2.838 32.578,3.6 33.086,3.6 33.086,3.346 32.959,3.219 32.832,3.219 ; 33.45,1.894 33.958,1.894 33.958,1.513 33.45,1.513 33.45,2.275 33.958,2.275 ; 33.467,2.838 33.467,3.219 33.467,3.6 ; 33.594,3.219 33.975,3.219 ; 33.975,2.838 33.975,3.6 ; 34.356,2.838 34.864,2.838 ; 34.356,3.219 34.864,3.219 ; 34.356,3.6 34.864,3.6 ; 35.245,3.6 35.245,2.965 35.372,2.838 35.753,2.838 35.88,2.965 35.88,3.6 ; 36.261,2.838 36.769,2.838 36.769,3.219 36.261,3.219 36.261,3.6 36.769,3.6

## Polygon pours and split planes (outlines as drawn)
GND on Bottom Layer "Bottom Layer-GND" (solid, pour order 138): 45.95,30.925 0,30.925 0,0 45.95,0
"BAT 5S" on Bottom Layer "Bottom Layer-BAT 5S 1" (solid, pour order 132): 45.712,30.675 45.717,26.05 37,26.05 37,30.675
NetQ1_2 on Bottom Layer "Bottom Layer-NetQ1_2" (solid, pour order 136): 37.925,30.673 37.925,25.8 45.8,25.8 45.8,0.313 45.712,0.225 29.575,0.225 29.575,22.1 28.725,22.95 28.4,23.275 28.4,30.7
NetC7_1 on Bottom Layer "Bottom Layer-NetC7_1" (solid, pour order 98): 25.25,7.475 25.25,0.975 24.425,0.15 17.075,0.15 11.675,5.55 11.675,15.925 12.425,16.675 23.4,16.675 25.75,14.325 28.69,14.325 29.175,13.84 29.175,7.757 28.89,7.475
NetC3_1 on Bottom Layer "Bottom Layer-NetC3_1" (solid, pour order 92): 28.725,22.575 29.225,22.075 29.225,18.497 28.891,18.169 25.727,18.169 11.6,18.169 11.6,29.175 13.223,30.7 27.95,30.7 27.95,23.35
NetC3_1 on Top Layer (solid, pour order 148): 21.525,30.925 21.525,26.325 21.975,25.875 28.65,25.875 29.45,26.675 29.45,30.925
NetC7_1 on Top Layer (solid, pour order 146): 15.425,0 15.425,5.875 23.425,5.875 24.65,4.65 24.65,0
no net on Top Layer (solid, pour order 144): 16.025,0.225

## Keep-outs
Keep-Out Layer:
  the board outline again, w0.254

## Other copper
Top Layer:
  pour cut-out: 22.8,-0.675

## Silkscreen, mask and mechanical layers (free items; w line width, h text height)
Top Overlay:
  text "VBAT" at 16.031,33.225 h1.52
  text "GND" at 10.031,33.1 h1.52
  text "M1" at 35.445,14.473 h1.52
Mechanical 1:
  lines w0.2: 0.675,4.925 ccw(c0.775,4.925) 0.775,4.825 cw(c0.775,4.925) 0.675,4.925 ; 0.675,53.525 cw(c0.775,53.525) 0.775,53.625 ccw(c0.775,53.525) 0.675,53.525